# Altium PCB PCB.PcbDoc
Units mm, origin at the board's own origin, x right, y up, seen from the top; angles counter-clockwise.
Board outline 90 x 70 mm, 2 copper layers (Top Layer, Bottom Layer); 97 components, 57 nets, 279 pads, 154 vias.
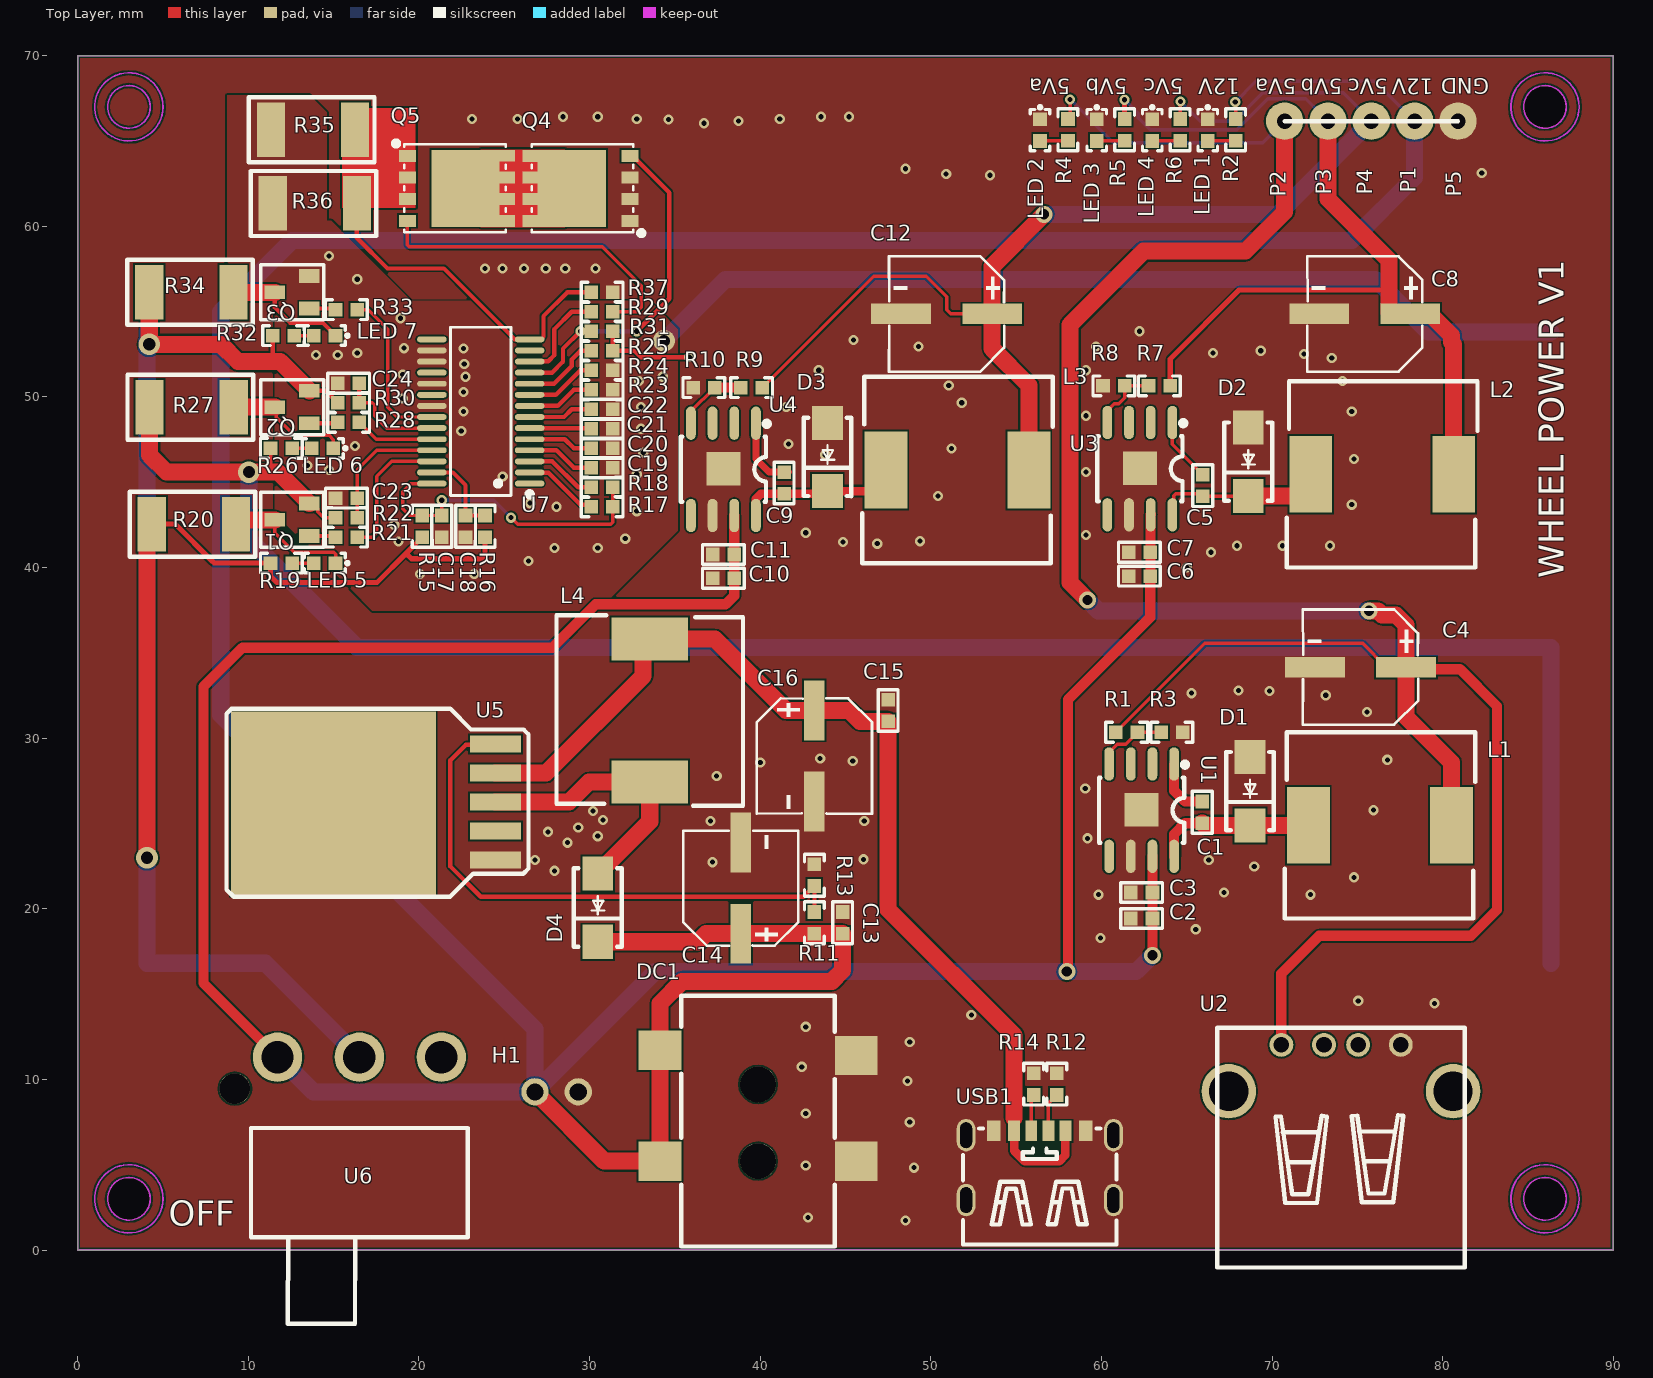
[diagram p0: Top Layer view]
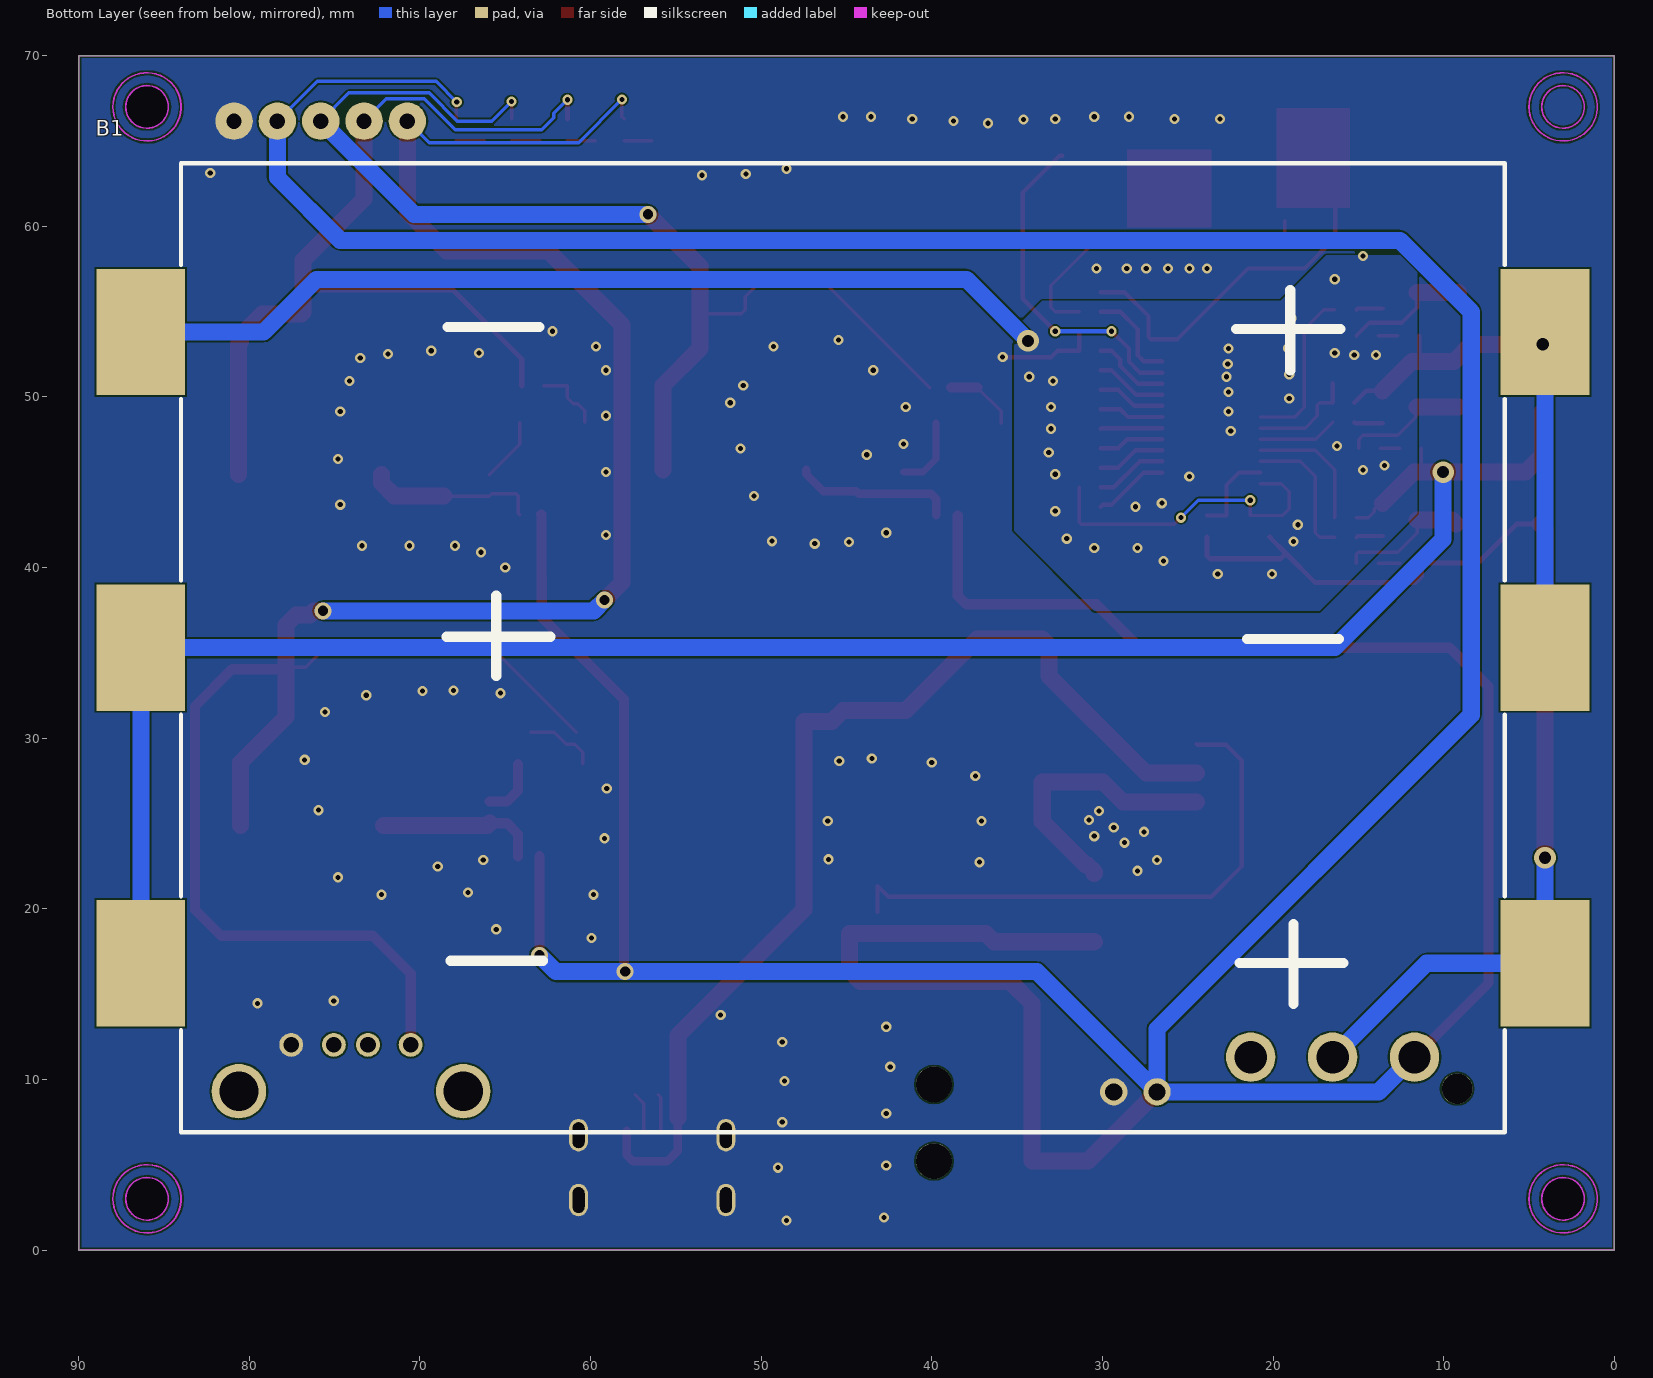
[diagram p1: Bottom Layer view, seen from below]

## Layer stack, top to bottom
Top Solder: solder mask 0.0102, Solder Resist, Dk 3.5
Top Layer: signal copper 0.0356
Dielectric 1: dielectric 0.32, FR-4, Dk 4.8
Bottom Layer: signal copper 0.0356
Bottom Solder: solder mask 0.0102, Solder Resist, Dk 3.5

## Board outline
0,0 0,70 90,70 90,0
cut-out: 84.75,3 ccw(c86,3) 86,1.75 ccw(c86,3) 87.25,3 ccw(c86,3) 86,4.25 ccw(c86,3)
cut-out: 1.75,3 ccw(c3,3) 3,1.75 ccw(c3,3) 4.25,3 ccw(c3,3) 3,4.25 ccw(c3,3)
cut-out: 84.75,67 ccw(c86,67) 86,65.75 ccw(c86,67) 87.25,67 ccw(c86,67) 86,68.25 ccw(c86,67)

## Design rules (kind name [scope] priority, off if disabled: settings)
Clearance [All] p1: gap=0.1 ignorepadtopadclearanceinfootprint=FALSE except(0: Arc-Hole Track-Hole SMDPad-Hole THPad-Hole Via-Hole Fill-Hole Poly-Hole Region-Hole Text-Hole; 0.102: Arc-Arc Arc-Track Arc-SMDPad Arc-THPad Track-Track Track-SMDPad Track-THPad SMDPad-SMDPad SMDPad-THPad THPad-THPad; 0.127: Arc-Via Track-Via SMDPad-Via SMDPad-Text THPad-Via Via-Via; 0.254: Arc-Text Track-Text THPad-Text Via-Text Fill-Text Poly-Text Region-Text Text-Text)
ComponentClearance [All] p1 off: gap=0 collisioncheckmode=3 verticalgap=0 showdistances=TRUE
HoleSize [All] p1: absolutevalues=TRUE maxlimit=30 minlimit=0.025 maxpercent=80.000 minpercent=20.000
HoleToHoleClearance [All] p1: gap=0.152 allowstackedmicrovias=TRUE
MinimumSolderMaskSliver [All] p1: minsoldermaskwidth=0
PlaneClearance [All] p1: clearance=0.254
PlaneConnect [All] p1: planeconnectstyle=Direct reliefexpansion=0.508 reliefentries=4 reliefconductorwidth=0.254 reliefairgap=0.254
PolygonConnect [All] p1: connectstyle=Direct reliefconductorwidth=0.254 reliefentries=4 polygonreliefangle="90 Angle" airgapwidth=0.254
RoutingVias [All] p1: holewidth=0.711 width=1.27 viastyle="Through Hole" minholewidth=0.3 minwidth=0.5 maxholewidth=30 maxwidth=30
SilkToSilkClearance [All] p1: silktosilkclearance=0
SilkToSolderMaskClearance [IsPad] p1: minsilkscreentomaskgap=0 clearancetoexposedcopper=TRUE
SolderMaskExpansion [All] p1: expansion=0.102 istentingtop=FALSE
Width [All] p1: maxlimit=5 minlimit=0.1 preferedwidth=0.254
22 further rules are at their usual default settings.

## Classes and differential pairs
component class Sheet1-MCU: C1 C2 C3 C4 C5 C6 C7 C8 C9 C10 C11 C12 C13 C14 C15 C16 D1 D2 D3 D4 DC1 H1 L1 L2 L3 L4 "LED 1" "LED 2" "LED 3" "LED 4" P1 P2 P3 P4 P5 R1 R2 R3 R4 R5 R6 R7 R8 R9 R10 R11 R12 R13 R14 U1 U2 U3 U4 U5 U6 USB1
component class Sheet2-bms: B1 C17 C18 C19 C20 C21 C22 C23 C24 "LED 5" "LED 6" "LED 7" Q1 Q2 Q3 Q4 Q5 R15 R16 R17 R18 R19 R20 R21 R22 R23 R24 R25 R26 R27 R28 R29 R30 R31 R32 R33 R34 R35 R36 R37 U7

## Components (designator, comment, footprint, x,y, rotation, side; value= is the part's Value field where it differs from the comment)
B1 "18650-box-3S" BAT-SMD_BH-18650-B5BA016 45.212,35.306 r0 bottom locked
C1 "0.01uf" CC1608-0603 65.913,25.654 r270 top
C2 "4.7uF 50V" CC1608-0603 62.357,19.431 r180 top
C3 "4.7uF 50V" CC1608-0603 62.357,20.955 r180 top
C4 "16V 220uF" CAP-SMD_D6.3 75.184,34.163 r180 top
C5 "0.01uf" CC1608-0603 65.938,44.806 r270 top
C6 "4.7uF 50V" CC1608-0603 62.23,39.497 r180 top
C7 "4.7uF 50V" CC1608-0603 62.23,40.894 r180 top
C8 "16V 220uF" CAP-SMD_D6.3 75.441,54.864 r180 top
C9 "0.01uf" CC1608-0603 41.402,44.958 r270 top
C10 "4.7uF 50V" CC1608-0603 37.846,39.37 r180 top
C11 "4.7uF 50V" CC1608-0603 37.846,40.767 r180 top
C12 "16V 220uF" CAP-SMD_D6.3 50.927,54.864 r180 top
C13 "100NF" CC1608-0603 44.831,19.177 r270 top
C14 "16V 220uF" CAP-SMD_D6.3 38.862,21.209 r90 top
C15 "100NF" CC1608-0603 47.498,31.623 r270 top
C16 "16V 220uF" CAP-SMD_D6.3 43.18,28.956 r270 top
C17 "10UF" CC1608-0603 21.336,42.418 r90 top
C18 "1UF" CC1608-0603 22.733,42.418 r90 top
C19 "100NF" CC1608-0603 30.734,45.847 r0 top
C20 "100NF" CC1608-0603 30.734,46.99 r0 top
C21 "100NF" CC1608-0603 30.734,48.133 r0 top
C22 "100NF" CC1608-0603 30.734,49.276 r0 top
C23 "1UF" CC1608-0603 15.748,44.069 r0 top
C24 "1UF" CC1608-0603 15.875,50.8 r0 top
D1 "B340A" "DO-214 AA" 68.707,26.892 r90 top
D2 "B340A" "DO-214 AA" 68.605,46.203 r90 top
D3 "B340A" "DO-214 AA" 43.942,46.482 r90 top
D4 "SS56" "DO-214 AA" 30.48,20.066 r90 top
DC1 "DC-2.1" DC-IN-SMD_DC-050-25A 39.878,8.457 r180 top
H1 "Header_2P_Curved" Header_2_54_2PW 26.797,9.271 r0 top
L1 "22UH" Inductor-1040 72.136,24.892 r90 top
L2 "22UH" Inductor-1040 72.263,45.466 r90 top
L3 "22UH" Inductor-1040 47.371,45.72 r90 top
L4 "47UH" Inductor-1040 33.528,35.814 r0 top
"LED 1" "LED 0603" "LED 0603" 66.232,65.64 r90 top
"LED 2" "LED 0603" "LED 0603" 56.404,65.64 r90 top
"LED 3" "LED 0603" "LED 0603" 59.726,65.64 r90 top
"LED 4" "LED 0603" "LED 0603" 62.979,65.64 r90 top
"LED 5" "LED 0603" "LED 0603" 14.478,40.259 r0 top
"LED 6" "LED 0603" "LED 0603" 14.351,46.99 r0 top
"LED 7" "LED 0603" "LED 0603" 14.478,53.594 r0 top
P1 "pogopin" pogopin 78.359,66.167 r0 top
P2 "pogopin" pogopin 70.739,66.167 r0 top
P3 "pogopin" pogopin 73.279,66.167 r0 top
P4 "pogopin" pogopin 75.819,66.167 r0 top
P5 "pogopin" pogopin 80.899,66.167 r0 top
Q1 "SI2302" SOT-23 13.577,41.849 r90 top
Q2 "SI2302" SOT-23 13.577,48.453 r90 top
Q3 "SI2302" SOT-23 13.577,55.184 r90 top
Q4 "NCE6045G" DFN-8_L5.8-W4.9-P1.27-LS6.1-BL-2 29.464,62.23 r90 top
Q5 "NCE6045G" DFN-8_L5.8-W4.9-P1.27-LS6.1-BL-2 22.225,62.23 r270 top
R1 "10K 1%" CR1608-0603 61.484,30.353 r180 top
R2 "1K" CR1608-0603 67.867,65.659 r270 top
R3 "3.24K 1%" CR1608-0603 64.135,30.353 r180 top
R4 "1K" CR1608-0603 58.039,65.659 r270 top
R5 "1K" CR1608-0603 61.362,65.659 r270 top
R6 "1K" CR1608-0603 64.615,65.659 r270 top
R7 "10K 1%" CR1608-0603 63.398,50.648 r0 top
R8 "3.24K 1%" CR1608-0603 60.731,50.648 r0 top
R9 "10K 1%" CR1608-0603 39.497,50.546 r0 top
R10 "3.24K 1%" CR1608-0603 36.703,50.546 r0 top
R11 "88.7K" CR1608-0603 43.18,19.177 r270 top
R12 "5.1K" CR1608-0603 57.389,9.724 r90 top
R13 "10K" CR1608-0603 43.18,21.971 r270 top
R14 "5.1K" CR1608-0603 56.028,9.724 r90 top
R15 "1K" CR1608-0603 20.193,42.418 r270 top
R16 "1K" CR1608-0603 23.876,42.418 r270 top
R17 "1M" CR1608-0603 30.734,43.561 r0 top
R18 "1M" CR1608-0603 30.734,44.704 r0 top
R19 "1K" CR1608-0603 11.938,40.259 r180 top
R20 "47R" "Cap Chip 2512" 9.271,42.545 r180 top
R21 "4.7MR" CR1608-0603 15.748,41.783 r180 top
R22 "1K" CR1608-0603 15.748,42.926 r180 top
R23 "10K" CR1608-0603 30.734,50.419 r0 top
R24 "7K" CR1608-0603 30.734,51.562 r0 top
R25 "220K" CR1608-0603 30.734,52.705 r0 top
R26 "1K" CR1608-0603 11.938,46.99 r180 top
R27 "47R" "Cap Chip 2512" 9.144,49.403 r180 top
R28 "4.7MR" CR1608-0603 15.875,48.514 r180 top
R29 "2K" CR1608-0603 30.734,54.991 r180 top
R30 "1K" CR1608-0603 15.875,49.657 r180 top
R31 "10MR" CR1608-0603 30.734,53.848 r180 top
R32 "1K" CR1608-0603 12.065,53.594 r180 top
R33 "4.7MR" CR1608-0603 15.748,55.118 r180 top
R34 "47R" "Cap Chip 2512" 9.121,56.134 r180 top
R35 "0.01R" "Cap Chip 2512" 16.256,65.659 r180 top
R36 "0.01R" "Cap Chip 2512" 16.36,61.341 r180 top
R37 "10MR" CR1608-0603 30.734,56.134 r0 top
U1 "TPS5430DDAR" SOIC-8-E 62.357,25.781 r180 top
U2 "USB2.0-A" USB2.0-A 74.041,10.668 r0 top
U3 "TPS5430DDAR" SOIC-8-E 62.255,45.796 r180 top
U4 "TPS5430DDAR" SOIC-8-E 37.846,45.758 r180 top
U5 "XL6019E1" TO-263-5 24.484,22.86 r90 top
U6 "HX SS12D10G4" SW-TH_3P-SS12D06 16.51,11.303 r0 top
U7 "BM3451SMDC-T28A" TSSOP-28 23.622,49.149 r90 top
USB1 "TYPE_C_SMD_6P" TYPE-C-SMD_TYPE-C-6P 56.388,4.953 r0 top

## Footprints (in the part's own frame and the unit in brackets; to place one, negate y for a bottom-side part, rotate by r counter-clockwise, add the part's x,y. Pads: shape width x height; smd on the part's side, far side on the other; paste and mask are expansions set on the pad)
BAT-SMD_BH-18650-B5BA016 [mm]
  rect 5.2x7.4 smd paste+0 mask+0.051: 1(-41.15,18.5) 2(41.15,18.5) 3(-41.15,0) 4(41.15,0) 5(-41.15,-18.5) 6(41.15,-18.5)
  round 1.8 hole 1.8 unplated paste+0: ""(-36,25.85)
  silkscreen extent -38.8,-28.4 38.8,28.4, body extent -42.95,-29.21 43.12,29.73, height 18.7
"Cap Chip 2512" [mm]
  rect 1.65x3.2 smd: 1(0,0) 2(4.93,0)
  silkscreen extent -1.14,-1.91 6.22,1.91, body extent -0.64,-1.4 5.59,1.4, height 0.25
CAP-SMD_D6.3 [mm] "直径6.3mm固态电容"
  rect 3.5x1.2 smd paste+0 mask+0.051: 1(-2.67,0) 2(2.67,0)
  silkscreen extent -3.38,-3.38 3.38,3.38, body extent -3.65,-3.3 3.65,3.3, height 5.9
CC1608-0603 [mm]
  rect 0.8x0.8 smd: 1(-0.635,0) 2(0.635,0)
  silkscreen extent -1.23,-0.58 1.23,0.58, body extent -0.8,-0.4 0.8,0.4, height 0.3
CR1608-0603 [mm]
  rect 0.8x0.8 smd: 1(-0.635,0) 2(0.635,0)
  silkscreen extent -1.23,-0.58 1.23,0.58, body extent -0.8,-0.4 0.8,0.4, height 0.45
DC-IN-SMD_DC-050-25A [mm]
  rect 2.5x2.3 smd: 1(5.75,3.25) 1(5.75,-3.25) 2(-5.75,3.25) 3(-5.75,-2.95)
  round 2.1 hole 2.1 unplated: ""(0,3.25) ""(0,-1.25)
  silkscreen extent -4.5,-6.45 4.5,8.25, body extent -6.28,-6.57 6.28,8.13, height 10.94
DFN-8_L5.8-W4.9-P1.27-LS6.1-BL-2 [mm]
  rect 0.7x1 smd paste-100 mask+0.05: 1(1.905,-2.9) 2(-1.905,-2.9) 2(-0.635,-2.9) 2(0.635,-2.9) 3(-1.905,2.9) 3(-0.635,2.9) 3(0.635,2.9) 3(1.905,2.9)
  rect 4.51x4 smd paste-100 mask+0.05: 8(0,0.508)
  silkscreen extent -2.78,-3.72 2.58,2.86, body extent -2.52,-3.11 2.48,2.99, height 0.95
"DO-214 AA" [mm] "SMB"
  rect 2x1.8 smd: 1(-2,0) 2(2,0)
  silkscreen extent -2.3,-1.4 2.3,1.4, body extent -2.83,-1.8 2.57,1.8, height 2.4
Header_2_54_2PW [mm] "弯的排针"
  round 1.6 hole 1: 1(0,0) 2(2.54,0)
  body extent -2.52,-7.47 5.18,0.38, height 5.8
Inductor-1040 [mm]
  rect 4.5x2.5 smd: 1(0,0) 2(0,-8.382)
  silkscreen extent -5.46,-9.78 5.46,1.4, body extent -5,-9.39 5,1.01, height 3.9
"LED 0603" [mm]
  rect 0.8x0.8 smd: 1(-0.635,0) 2(0.635,0)
  silkscreen extent -1.21,-0.57 1.4,0.57, body extent -0.8,-0.4 0.8,0.4, height 0.6
pogopin [mm]
  round 2.2 hole 0.9: 1(0,0)
  body extent -1,-1 1,1, height 10
SOIC-8-E [mil]
  oval 22.38x76.78 smd paste+0 mask+2: 1(-75,-106.5) 2(-25,-106.5) 3(25,-106.5) 4(75,-106.5) 5(75,106.5) 6(25,106.5) 7(-25,106.5) 8(-75,106.5)
  rect 78.74x76.78 smd paste+0 mask+2: 9(0,-1)
  silkscreen extent -106,-111 98,75, body extent -98,-125 98,120, height 69
SOT-23 [mm]
  rect 0.8x1.2 smd: 1(0,0) 2(1.905,0) 3(0.95,2.02)
  silkscreen extent -0.66,-0.84 2.57,2.84, body extent -0.61,-0.23 2.39,2.27, height 1.05
SW-TH_3P-SS12D06 [mm]
  round 2.9 hole 1.9 paste+0 mask+0.051: 1(-4.8,0) 2(0,0) 3(4.8,0)
  silkscreen extent -6.35,-15.62 6.35,-4.15, body extent -6.35,-15.68 6.35,-4.19, height 6.7
TO-263-5 [mm]
  rect 1x3 smd: 1(0,0) 2(1.7,0) 3(3.4,0) 4(5.1,0) 5(6.8,0)
  rect 10.8x12 smd: 6(3.302,9.498)
  silkscreen extent -2.16,-1.94 8.86,15.76, body extent -1.63,-0.74 8.37,14.93, height 4.88
TSSOP-28 [mm]
  oval 0.343x1.731 smd paste+0 mask+0.051: 1(-4.225,-2.866) 2(-3.575,-2.866) 3(-2.925,-2.866) 4(-2.275,-2.866) 5(-1.625,-2.866) 6(-0.975,-2.866) 7(-0.325,-2.866) 8(0.325,-2.866) 9(0.975,-2.866) 10(1.625,-2.866) 11(2.275,-2.866) 12(2.925,-2.866) 13(3.575,-2.866) 14(4.225,-2.866) 15(4.225,2.866) 16(3.575,2.866) 17(2.925,2.866) 18(2.275,2.866) 19(1.625,2.866) 20(0.975,2.866) 21(0.325,2.866) 22(-0.325,2.866) 23(-0.975,2.866) 24(-1.625,2.866) 25(-2.275,2.866) 26(-2.925,2.866) 27(-3.575,2.866) 28(-4.225,2.866)
  silkscreen extent -5,-3.02 4.93,1.77, body extent -4.85,-3.2 4.85,3.2, height 1.02
TYPE-C-SMD_TYPE-C-6P [mm]
  oval 1.1x1.9 hole 0.7 slot 1.5 at 90 deg paste+0 mask+0.051: 7(-4.32,-2.025) 7(-4.32,1.775) 7(4.32,-2.025) 7(4.32,1.775)
  rect 0.7x1.2 smd paste-100 mask+0.051: A5(-0.5,2.025) A9(1.5,2.025) B5(0.5,2.025) B9(-1.5,2.025)
  rect 0.8x1.2 smd paste-100 mask+0.051: A12(2.7,2.025) B12(-2.7,2.025)
  silkscreen extent -4.5,-4.63 4.5,2.18, body extent -4.44,-4.47 4.49,2.43, height 3.18
USB2.0-A [mm]
  round 3.2 hole 2.3: 0(-6.571,-1.359) 0(6.571,-1.359)
  round 1.4 hole 0.92: 1(-3.492,1.359) 2(-0.993,1.359) 3(1.008,1.359) 4(3.508,1.359)
  silkscreen extent -7.25,-11.7 7.26,2.37, body extent -7.85,-11.28 7.95,2.42, height 6.95

## Part data
B1: "18650贴片电池盒"
C1 C2 C3 C5 C6 C7 C9 C10 C11: library part "Chip capacitor", "贴片电容"
C4 C8 C12 C14 C16: library part "Cap ECAP SMD", "铝点解电容", BOM_Manufacturer=PANASONIC, BOM_Manufacturer Part=EEEFP1C681AP, BOM_Supplier=LCSC, BOM_Supplier Part=C413527, Contributor=LCSC, nameAlias=Capacitance, spicePre=C, spiceSymbolName=EEEFP1C681AP
C13 C15 C17 C18 C19 C20 C21 C22 C23 C24: library part "Cap Chip 0603", "0603封装的电容", Published=8-Jun-2000, Publisher="Altium Limited", Revision="July-2002: Re-released for DXP Platform."
D1 D2 D3: "40V 3A 550mV@3A", BOM_JLCPCB Part Class="Extended Part", BOM_Manufacturer=MDD, BOM_Manufacturer Part=B340A, BOM_Supplier=LCSC, BOM_Supplier Part=C64982, spicePre=D, spiceSymbolName=B340A
D4: library part SS34, "肖特基二极管"
DC1: library part DC-050, "DC贴片插座", BOM_JLCPCB Part Class="Extended Part", BOM_Manufacturer=韩国韩荣, BOM_Manufacturer Part=DC-050-25A, BOM_Supplier=LCSC, BOM_Supplier Part=C707275, Contributor=LCSC, spicePre=D, spiceSymbolName=DC-050-25A
H1: "弯的2P排针"
L1 L2 L3 L4: library part Inductor-1040, "1040封装 一体成型 贴片 功率电感"
P1 P2 P3 P4 P5: "插板式顶针 连接器弹簧天线插针SMT触点测试铜针双弹贴片式"
Q1 Q2 Q3: "N沟道  / 漏源电压(Vdss) 20V  / 连续漏极电流(Id) 2.8A  / 功率(Pd) 900mW  / 导通电阻(RDS(on)@Vgs,Id) 55mΩ@4.5V,2.8A  / 阈值电压(Vgs(th)@Id) 1.2V@250uA  / 输入电容(Ciss@Vds) 260pF@10V", JLCPCB Part Class="Extended Part", Manufacturer=TWGMC(台湾迪嘉), Manufacturer Part=SI2306, Contributor=LCSC, spicePre=Q, spiceSymbolName=SI2306_C727154, Supplier=LCSC, Supplier Part=C727154
Q4 Q5: "原装NCE6045G DFN-8(5x6) N沟道60V 45A增强型功率MOSFET场效应管", JLCPCB Part Class="Extended Part", Manufacturer=TWGMC(台湾迪嘉), Manufacturer Part=SI2306, Contributor=LCSC, spicePre=Q, spiceSymbolName=SI2306_C727154, Supplier=LCSC, Supplier Part=C727154
R1 R3 R7 R8 R9 R10: library part "Chip resistor", "贴片电阻"
R2 R4 R5 R6 R11 R12 R13 R14 R15 R16 R17 R18 R19 R21 R22 R23 R24 R25 R26 R28 R29 R30 R31 R32 R33 R37: library part "Resistor Chip 0603", "0603封装电阻", Published=8-Jun-2000, Publisher="Altium Limited", Revision="July-2002: Re-released for DXP Platform."
R20 R27 R34 R35 R36: library part "Cap Chip 2512"
U1 U3 U4: "宽电压DCDC降压IC"
U2: "USB母座"
U5: "升压芯片 5A最大输出"
U6: library part SW-TH_3P-SS12D06, BOM_JLCPCB Part Class="Extended Part", BOM_Manufacturer=hanxia(韩下), BOM_Manufacturer Part="HX SS12D10G4", BOM_Supplier=LCSC, BOM_Supplier Part=C5149841, Contributor=lcsc, link=https://atta.szlcsc.com/upload/public/pdf/source/20220907/2020D7183ED16DD6E2B9F5A13FB144CF.pdf, spicePre=U, spiceSymbolName="HX SS12D10G4"
U7: Manufacturer=null, Contributor=lcsc, Manufacturer Part=BM3451SMDC-T28A, spicePre=U, spiceSymbolName=BM3451SMDC-T28A, Supplier=LCSC, Supplier Part=C9900155136
USB1: JLCPCB Part Class="Extended Part", Manufacturer=null, Contributor=LCSC, Manufacturer Part=TYPE_C_SMD_6P, spicePre=U, spiceSymbolName=TYPE_C_SMD_6P, Supplier=LCSC, Supplier Part=C9900003080

## Via types
v1: diameter 0.6, hole 0.3, Top Layer to Bottom Layer, 121 vias
v2: diameter 0.6, hole 0.3, Top Layer to Bottom Layer, tented both sides, 24 vias
v3: diameter 1, hole 0.6, Top Layer to Bottom Layer, 5 vias
v4: diameter 1.27, hole 0.711, Top Layer to Bottom Layer, 4 vias

## Nets (pads, with @x,y where several pads share a name; then routed paths per layer and width w, separated by ;. In a path a pad name is that pad's centre, name@x,y a point inside that pad or via, vN(x,y) a via of type N, cw(c..) or ccw(c..) an arc to the next point about the centre after c; other vN are vias at no path point)
5V_1: C4.1 L1.2 P2.1 R1.2 R4.1 U2.1 | length 141
  Top Layer w0.2: R4.1 58.166,66.421 v1(58.166,67.437) ; R1.2 66.056,35.56 75.307,35.56 76.704,34.163 C4.1
  Top Layer w0.6: U2.1 70.549,16.192 72.771,18.415 81.661,18.415 83.185,19.939 83.185,31.877 81.026,34.036 77.981,34.036 C4.1
  Top Layer w1: v3(59.182,38.1) 58.166,39.116 58.166,54.229 62.484,58.547 68.453,58.547 70.739,60.833 P2.1 ; v3(75.692,37.465) 76.2,37.465 76.454,37.211 77.268,37.211 77.854,36.625 C4.1 77.854,31.239 80.518,28.575 L1.2
  Bottom Layer w0.2: v1(58.166,67.437) 60.706,64.897 69.469,64.897 P2.1
  Bottom Layer w1: v3(59.182,38.1) 59.817,37.465 v3(75.692,37.465)
5V_2: C8.1 L2.2 P3.1 R5.1 R7.2 | length 56.5
  Top Layer w0.3: R5.1 v1(61.362,67.416) ; R7.2 64.033,52.222 68.072,56.261 76.607,56.261 76.861,56.007
  Top Layer w1: P3.1 73.279,61.595 76.861,58.013 76.861,56.007 76.861,54.964 76.961,54.864 C8.1 79.261,54.864 80.518,53.607 80.518,53.213 80.645,53.086 L2.2
  Bottom Layer w0.2: v1(61.362,67.416) 62.152,66.626 62.152,66.372 62.865,65.659 67.945,65.659 69.755,67.469 71.977,67.469 P3.1
5V_3: C12.1 L3.2 P4.1 R6.1 R9.2 | length 70.1
  Top Layer w0.2: R9.2 46.652,57.066 49.741,57.066 50.927,55.88 50.927,55.118 51.181,54.864 C12.1 ; R6.1 64.615,67.282 v1(64.643,67.31)
  Top Layer w1: L3.2 55.753,50.673 53.597,52.829 C12.1 53.597,57.661 v3(56.642,60.706)
  Bottom Layer w0.2: v1(64.643,67.31) 65.786,66.167 67.818,66.167 69.469,67.818 74.168,67.818 P4.1
  Bottom Layer w1: v3(56.642,60.706) 70.358,60.706 P4.1
12.33V: C2.1 C3.1 C6.1 C7.1 C10.1 C11.1 C13.2 C14.1 D4.1 DC1.1 H1.1 P1.1 R2.1 R11.2 U1.7 U3.7 U4.7 U6.1 | length 341
  Top Layer w0.2: v1@67.818,67.31 67.867,67.261 R2.1
  Top Layer w0.6: U6.1 7.366,15.647 7.366,33.02 9.652,35.306 27.813,35.306 30.353,37.846 37.973,37.846 38.481,38.354 C10.1 C11.1 U4.7 ; v3@57.912,16.256 58.039,16.383 58.039,32.258 62.865,37.084 C6.1 62.878,39.51 62.878,43.078 U3.7 ; v3(62.992,17.272) C2.1 C3.1 U1.7
  Top Layer w1: H1.1 30.861,5.207 34.128,5.207 34.128,11.707 34.128,14.443 35.433,15.748 44.196,15.748 44.831,16.383 C13.2 R11.2 38.865,18.542 C14.1 36.833,18.539 36.36,18.066 D4.1
  Bottom Layer w0.2: v1(67.843,67.285) 69.058,68.501 76.025,68.501 P1.1
  Bottom Layer w1: U6.1@11.779,11.303 13.83,9.251 26.777,9.251 H1.1 ; v3(62.992,17.272) 62.039,16.319 v3(57.975,16.319) 33.846,16.319 H1.1 ; P1.1 78.359,62.865 74.676,59.182 12.573,59.182 8.382,54.991 8.382,31.369 26.797,12.954 H1.1
BANK+: B1.1 R15.2 R16.2 R19.2 R20.2 U6.2 | length 65.3
  Top Layer w0.3: R20.2 5.715,42.545 7.875,40.385 8.001,40.259 R19.2 11.303,39.497 11.684,39.116 17.526,39.116 19.241,40.831 ; R15.2 19.241,40.831 ; R16.2 23.876,40.689 23.7,40.513 19.558,40.513 19.241,40.831
  Top Layer w1: v4@4.064,23.06 4.064,42.268 R20.2
  Bottom Layer w1: v4(4.064,22.987) 4.064,16.808 B1.1 11.007,16.806 U6.2
BAT_GND: B1.6 C17.1 C18.1 C19.2 C20.2 C21.2 C22.2 C23.1 C24.1 Q3.2 R23.2 R24.2 R35.2 R36.2 U7.16 U7.17 U7.19 U7.21 | length 54.8
  Bottom Layer w1: v4(34.365,53.288) 37.973,56.896 76.073,56.896 79.163,53.806 B1.6
  other v1: 20.066,39.624 23.241,39.624 26.416,40.386 27.94,41.148 30.48,41.148 18.796,41.529 32.093,41.695 18.547,42.508 32.766,43.307 28.067,43.561 26.519,43.773 24.908,45.339 32.766,45.466 14.732,45.72 13.462,45.974 33.147,46.736 16.256,47.117 22.479,48.006 33.02,48.133 22.606,49.149 33.02,49.403 19.05,49.911 22.606,50.292 32.893,50.927 22.733,51.181 34.29,51.181 19.05,51.308 22.657,51.934 13.97,52.451 15.24,52.451 16.383,52.578 22.606,52.832 19.123,52.858 18.923,54.61 16.383,56.896 14.732,58.255
GND: "LED 1.2" "LED 2.2" "LED 3.2" "LED 4.2" C2.2 C3.2 C4.2 C6.2 C7.2 C8.2 C10.2 C11.2 C12.2 C13.1 C14.2 C15.1 C16.2 D1.2 D2.2 D3.2 DC1.2 DC1.3 H1.2 P5.1 Q4.2 R3.1 R8.1 R10.1 R12.2 R13.1 R14.2 R25.2 R31.1 R37.2 U1.6 U1.9 U2.4 U3.6 U3.9 U4.6 U4.9 U5.1 USB1.7 USB1.A12 USB1.B12 | length 5.7
  Top Layer w0.254: R31.1 R25.2 32.639,52.705 33.02,52.324 v2@35.814,52.324
  other v1: 48.526,1.723 42.799,1.905 49.022,4.826 42.672,4.953 48.768,7.493 42.672,8.001 48.641,9.906 42.435,10.735 48.768,12.192 42.672,13.081 52.379,13.771 79.532,14.456 75.057,14.605 59.944,18.288 65.532,18.796 59.827,20.829 72.263,20.828 67.183,20.955 74.803,21.844 68.961,22.479 37.211,22.733 26.797,22.86 66.294,22.86 46.05,22.899 59.182,24.13 30.48,24.257 37.084,25.146 46.101,25.146 75.946,25.781 59.055,27.051 37.45,27.776 40.005,28.575 45.426,28.664 76.761,28.729 43.517,28.815 75.57,31.526 73.152,32.512 65.278,32.639 69.85,32.766 68.029,32.792 65.006,40.009 66.421,40.894 67.945,41.275 70.612,41.275 73.406,41.275 46.863,41.402 44.863,41.49 49.364,41.546 59.093,41.91 42.672,42.037 74.676,43.688 50.419,44.196 59.093,45.593 74.803,46.355 43.815,46.609 51.216,46.973 41.656,47.244 59.093,48.895 74.676,49.149 41.529,49.403 51.816,49.657 51.054,50.673 74.137,50.93 43.434,51.562 59.093,51.562 73.505,52.288 71.87,52.519 66.548,52.578 69.342,52.705 49.276,52.959 59.69,52.959 45.466,53.34 62.23,53.848 53.467,62.992 50.901,63.068 82.296,63.119 48.514,63.373
  other v2: 27.94,22.225 28.702,23.876 27.559,24.511 29.337,24.765 30.781,25.208 30.205,25.733 35.847,52.344 23.876,57.531 24.892,57.531 26.162,57.531 27.432,57.531 28.575,57.531 30.353,57.531 36.703,66.04 38.735,66.167 34.63,66.255 23.114,66.294 25.781,66.294 32.766,66.294 41.148,66.294 28.448,66.421 30.48,66.421 43.561,66.421 45.212,66.421
NetB1_2: B1.2 B1.4 Q1.2 R22.2 R26.2 R27.2 | length 118.1
  Top Layer w0.2: R26.2 11.303,46.028 11.738,45.593 ; Q1.2 13.777,43.754 14.077,43.454 14.077,43.262 14.413,42.926 R22.2
  Top Layer w1: R27.2@4.214,49.149 4.214,46.586 5.207,45.593 11.738,45.593 Q1.2
  Bottom Layer w1: v4(10.033,45.593) 10.033,41.656 16.383,35.306 B1.4 B1.2
NetB1_3: B1.3 B1.5 Q2.2 R30.2 R32.2 R34.2 | length 35.5
  Top Layer w0.254: 11.43,52.07 R32.2 ; Q2.2 14.539,50.358 R30.2
  Top Layer w1: R34.2 v4(4.191,53.086) 8.382,53.086 9.398,52.07 11.43,52.07 11.865,52.07 Q2.2
  Bottom Layer w1: B1.3 B1.5
NetC1_1: C1.1 U1.1 | length 3.5
  Top Layer w0.6: U1.1 64.262,26.924 64.897,26.289 C1.1
NetC1_2: C1.2 D1.1 L1.1 U1.8 | length 9.5
  Top Layer w0.6: U1.8 64.262,24.384 64.897,25.019 C1.2
  Top Layer w1: C1.2 66.04,24.892 D1.1 L1.1
NetC5_1: C5.1 U3.1 | length 3.8
  Top Layer w0.2: U3.1 64.16,47.219 C5.1
NetC5_2: C5.2 D2.1 L2.1 U3.8 | length 10.1
  Top Layer w0.2: U3.8 64.231,43.162 64.231,44.206 64.348,44.323 65.786,44.323 C5.2 68.573,44.171 D2.1
  Top Layer w1: D2.1 71.513,44.203 72.263,44.953 L2.1
NetC9_1: C9.1 U4.1 | length 4.3
  Top Layer w0.4: U4.1 39.751,46.355 40.513,45.593 C9.1@41.656,45.593
NetC9_2: C9.2 D3.1 L3.1 U4.8 | length 9.4
  Top Layer w0.5: U4.8 39.751,44.03 40.044,44.323 41.656,44.323 44.291,44.323 44.45,44.482 46.371,44.482 47.371,45.482 L3.1
NetC17_2: C17.2 R15.1 R17.2 R18.2 U7.28 | length 19
  Top Layer w0.2: U7.28 19.524,44.924 19.05,44.45 19.05,43.434 19.431,43.053 R15.1 C17.2 v1(21.336,43.942) ; v1(25.4,42.926) 25.781,42.545 31.252,42.545 31.369,42.662 R17.2 R18.2
  Bottom Layer w0.2: v1(21.336,43.942) 24.384,43.942 v1(25.4,42.926)
NetC18_2: C18.2 R16.1 U7.27 | length 5.2
  Top Layer w0.254: U7.27 21.99,45.574 22.733,44.831 C18.2 R16.1
NetC19_1: C19.1 U7.4 | length 4
  Top Layer w0.254: U7.4 28.056,46.874 29.083,45.847 C19.1
NetC20_1: C20.1 U7.5 | length 3.8
  Top Layer w0.254: U7.5 28.549,47.524 29.083,46.99 C20.1
NetC21_1: C21.1 U7.6 | length 3.6
  Top Layer w0.254: U7.6 30.058,48.174 C21.1
NetC22_1: C22.1 U7.7 | length 3.8
  Top Layer w0.254: U7.7 28.504,48.824 28.956,49.276 C22.1
NetC23_2: C23.2 R22.1 U7.25 | length 7.6
  Top Layer w0.2: R22.1 C23.2 16.383,45.72 17.537,46.874 U7.25
NetC24_2: C24.2 R30.1 U7.23 | length 6.4
  Top Layer w0.2: R30.1 17.272,49.657 17.399,49.53 17.399,48.895 18.12,48.174 U7.23
  Top Layer w0.254: R30.1 C24.2
NetD4_2: D4.2 L4.2 U5.3 | length 16.2
  Top Layer w1: U5.3 28.8,26.26 29.972,27.432 L4.2 33.528,25.114 30.98,22.566 30.88,22.566 30.48,22.166 D4.2
"NetLED 1_1": "LED 1.1" R2.2 | length 1.6
  Top Layer w0.2: 66.232,65.005 67.848,65.005 R2.2
"NetLED 2_1": "LED 2.1" R4.2 | length 1.6
  Top Layer w0.2: 56.404,65.005 58.02,65.005 R4.2
"NetLED 3_1": "LED 3.1" R5.2 | length 1.6
  Top Layer w0.2: 59.726,65.005 61.343,65.005 R5.2
"NetLED 4_1": "LED 4.1" R6.2 | length 1.6
  Top Layer w0.2: 62.979,65.005 64.596,65.005 R6.2
"NetLED 5_1": "LED 5.1" R19.1 | length 1.3
  Top Layer w0.2: R19.1 13.843,40.259
"NetLED 5_2": "LED 5.2" Q1.3 R20.1 | length 7.7
  Top Layer w0.2: Q1.3 11.557,42.037 12.7,40.894 14.996,40.894 15.113,40.777 15.113,40.259
  Top Layer w1: R20.1 9.525,42.799 Q1.3
"NetLED 6_1": "LED 6.1" R26.1 | length 1.1
  Top Layer w0.2: R26.1 13.716,46.99
"NetLED 6_2": "LED 6.2" Q2.3 R27.1 | length 7.4
  Top Layer w0.2: Q2.3 11.632,49.328 11.632,48.82 12.7,47.752 14.732,47.752 14.986,47.498 14.986,46.99
  Top Layer w1: R27.1 Q2.3
"NetLED 7_1": "LED 7.1" R32.1 | length 1.1
  Top Layer w0.2: R32.1 13.843,53.594
"NetLED 7_2": "LED 7.2" Q3.3 R34.1 | length 7.6
  Top Layer w0.254: Q3.3 11.557,55.245 12.446,54.356 14.351,54.356 15.113,53.594
  Top Layer w1: R34.1 Q3.3
NetQ1_1: Q1.1 R21.2 | length 1.6
  Top Layer w0.254: Q1.1 15.047,41.849 R21.2
NetQ2_1: Q2.1 R28.2 | length 1.7
  Top Layer w0.254: Q2.1 15.179,48.453 R28.2
NetQ3_1: Q3.1 R33.2 | length 1.6
  Top Layer w0.254: Q3.1 15.047,55.184 R33.2
NetQ4_1: Q4.1 R31.2 U7.11 | length 20.5
  Top Layer w0.254: U7.11 27.802,51.424 28.448,52.07 28.448,52.832 v1(29.464,53.848) R31.2 ; Q4.1 32.514,64.135 34.671,61.978 34.671,55.753 v1(32.766,53.848)
  Bottom Layer w0.254: v1(29.464,53.848) v1(32.766,53.848)
NetQ4_3: Q4.3 Q5.3
NetQ5_1: Q5.1 R29.1 | length 19.1
  Top Layer w0.2: Q5.1 19.325,58.918 19.442,58.801 30.734,58.801 33.02,56.515 33.02,55.245 32.766,54.991 R29.1
NetQ5_2: Q5.2 R35.1 R36.1 R37.1 U7.14 | length 20.1
  Top Layer w0.254: R36.1 16.36,59.332 18.161,57.531 21.463,57.531 25.603,53.391 26.471,53.391 U7.14 27.158,53.374 27.305,53.521 27.305,54.737 28.702,56.134 R37.1
NetR1_1: R1.1 R3.2 U1.4 | length 4.2
  Top Layer w0.2: U1.4 60.452,29.177 60.925,29.65 61.416,29.65 R1.1 R3.2
NetR7_1: R7.1 R8.2 U3.4 | length 4.1
  Top Layer w0.2: U3.4 60.35,49.192 60.764,49.605 61.024,49.605 61.366,49.948 R8.2 R7.1
NetR9_1: R9.1 R10.2 U4.4 | length 4.2
  Top Layer w0.2: U4.4 35.941,49.149 R10.2
  Top Layer w0.6: R10.2 R9.1
NetR11_1: R11.1 R13.2 U5.5 | length 33.1
  Top Layer w0.254: U5.5 24.434,29.61 22.752,29.61 21.844,28.702 21.844,22.479 23.622,20.701 42.545,20.701 R13.2 R11.1
NetR12_1: R12.1 USB1.B5 | length 2.3
  Top Layer w0.2: USB1.B5 56.888,8.587 R12.1
NetR14_1: R14.1 USB1.A5 | length 2.2
  Top Layer w0.2: USB1.A5 55.888,8.948 R14.1
NetR17_1: R17.1 U7.2 | length 4.4
  Top Layer w0.254: U7.2 26.505,45.557 27.595,45.557 29.467,43.685 29.975,43.685 R17.1
NetR18_1: R18.1 U7.3 | length 4.2
  Top Layer w0.254: U7.3 27.817,46.224 29.337,44.704 R18.1
NetR21_1: R21.1 U7.26 | length 8.1
  Top Layer w0.2: R21.1 17.272,41.783 17.526,42.037 17.526,45.339 18.411,46.224 U7.26
NetR23_1: R23.1 U7.8 | length 4
  Top Layer w0.254: U7.8 28.138,49.474 29.083,50.419 R23.1
NetR24_1: R24.1 U7.9 | length 4.2
  Top Layer w0.254: U7.9 28.026,50.124 29.464,51.562 R24.1
NetR25_1: R25.1 U7.10 | length 4.6
  Top Layer w0.254: U7.10 27.914,50.774 28.956,51.816 28.956,52.197 29.464,52.705 R25.1
NetR28_1: R28.1 U7.24 | length 4.7
  Top Layer w0.2: R28.1 17.5,47.524 U7.24
NetR29_2: R29.2 U7.12 | length 5.7
  Top Layer w0.254: U7.12 26.505,52.091 27.58,52.091 27.94,52.451 27.94,53.975 28.956,54.991 R29.2
NetR33_1: R33.1 U7.22 | length 9.7
  Top Layer w0.2: R33.1 17.018,55.118 18.161,53.975 18.161,49.403 18.74,48.824 U7.22
"USB 5V": C15.2 C16.1 L4.1 U5.4 USB1.A9 USB1.B9 | length 62.4
  Top Layer w0.5: 54.888,7.747 USB1.B9 54.888,5.818 55.499,5.207 57.531,5.207 57.888,5.564 USB1.A9
  Top Layer w1: U5.4 27.452,27.96 33.142,33.65 33.142,35.428 L4.1 37.338,35.814 41.526,31.626 C16.1 45.209,31.626 45.847,30.988 C15.2 47.498,19.963 54.888,12.573 54.888,7.747
pads on no net: B1. DC1. Q4.8 Q5.8 U1.2 U1.3 U1.5 U2.0 U2.2 U2.3 U3.2 U3.3 U3.5 U4.2 U4.3 U4.5 U5.2 U5.6 U6.3 U7.1 U7.13 U7.15 U7.18 U7.20

## Polygon pours and split planes (outlines as drawn)
GND on Bottom Layer "GND_L02_P004" (solid, pour order 4): 0,0 0,70 90,70 90,0
BAT_GND on Bottom Layer "BAT_GND_L02_P001" (solid, remove dead copper, pour order 1): 11.557,58.293 16.891,58.293 19.558,55.626 33.528,55.626 35.179,53.975 35.179,42.164 30.48,37.465 17.272,37.465 11.557,43.18 11.557,55.118
BAT_GND on Top Layer "BAT_GND_L01_P000" (solid, remove dead copper, pour order 0): 8.763,67.691 13.589,67.691 14.605,66.675 14.605,60.325 14.859,60.325 19.558,55.626 33.528,55.626 35.179,53.975 35.179,42.164 30.48,37.465 17.272,37.465 11.557,43.18 11.557,55.118 8.763,57.912
GND on Top Layer "GND_L01_P003" (solid, pour order 3): 0,0 0,70 90,70 90,0

## Keep-outs
Keep-Out Layer:
  circle w0.1: c86,67 r2
  circle w0.1: c86,3 r2
  circle w0.1: c3,3 r2
  circle w0.1: c3,67 r2
  circle w0.1: c86,67 r1.25
  circle w0.1: c86,3 r1.25
  circle w0.1: c3,3 r1.25
  circle w0.1: c3,67 r1.25
  lines w0.1: 0,0 90,0 90,70 0,70 0,0

## Other copper
Top Layer:
  rectangle net NetQ5_2: 15.494,61.087 19.812,66.929
  rectangle net NetQ4_3: 23.622,59.944 28.575,64.516

## Silkscreen, mask and mechanical layers (free items; w line width, h text height)
Top Overlay:
  lines w0.254: 70.739,66.167 73.279,66.167 75.819,66.167 78.359,66.167 80.899,66.167
  text "12V" at 68.095,68.948 h1.52 r180
  text "12V" at 79.453,68.948 h1.52 r180
  text "GND" at 82.725,68.962 h1.52 r180
  text "5Va" at 58.166,68.945 h1.52 r180
  text "5Vb" at 61.502,68.945 h1.52 r180
  text "5Vc" at 64.805,68.945 h1.52 r180
  text "5Va" at 71.429,68.945 h1.52 r180
  text "5Vb" at 74.13,68.945 h1.52 r180
  text "5Vc" at 76.799,68.945 h1.52 r180
  text "WHEEL POWER V1" at 87.604,39.37 h2.52 r90
  text "OFF" at 5.334,0.915 h2.5
Top Solder:
  circle w1: c86,3 r1.5
  circle w1: c86,67 r1.5
  circle w1: c3,67 r1.5
  circle w1: c3,3 r1.5
Bottom Solder:
  circle w1: c86,3 r1.5
  circle w1: c86,67 r1.5
  circle w1: c3,67 r1.5
  circle w1: c3,3 r1.5